# Altium PCB PMI_Split.PcbDoc
Units mm, origin at the board's own origin, x right, y up, seen from the top; angles counter-clockwise.
Board outline 65 x 25 mm, 2 copper layers (Top Layer, Bottom Layer); 12 components, 12 nets, 34 pads, 1 vias.
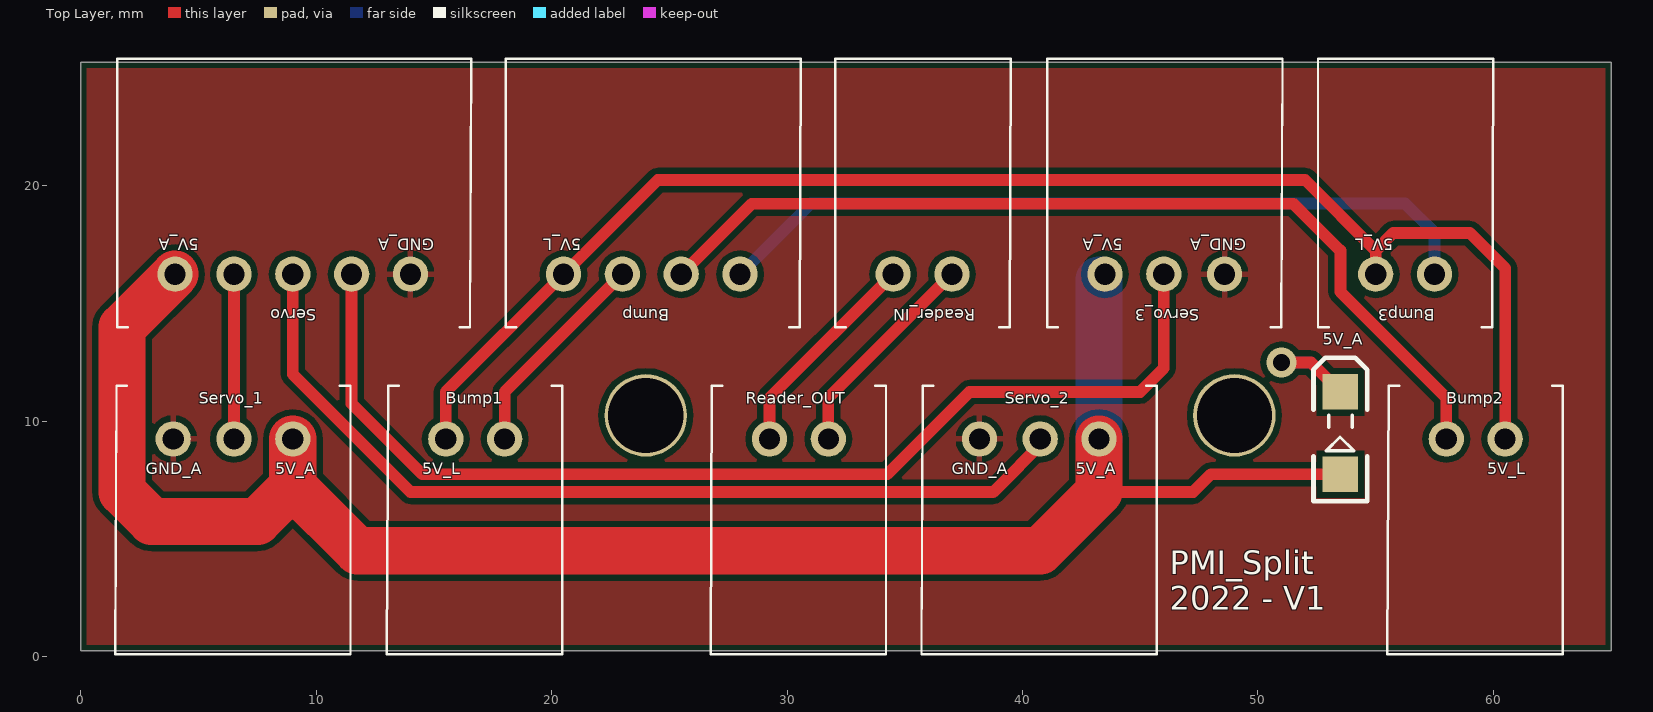
[diagram p0: Top Layer view]
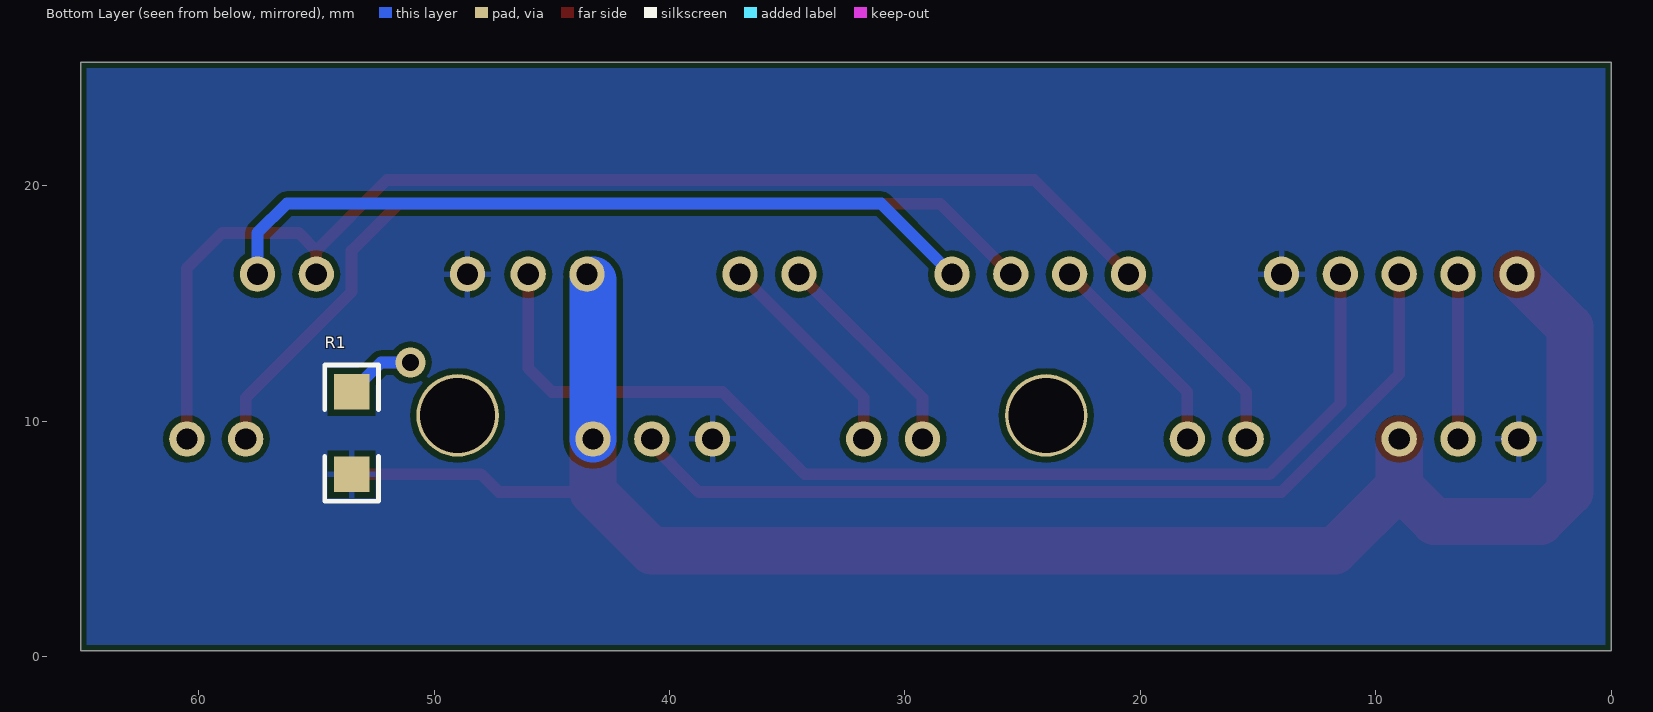
[diagram p1: Bottom Layer view, seen from below]
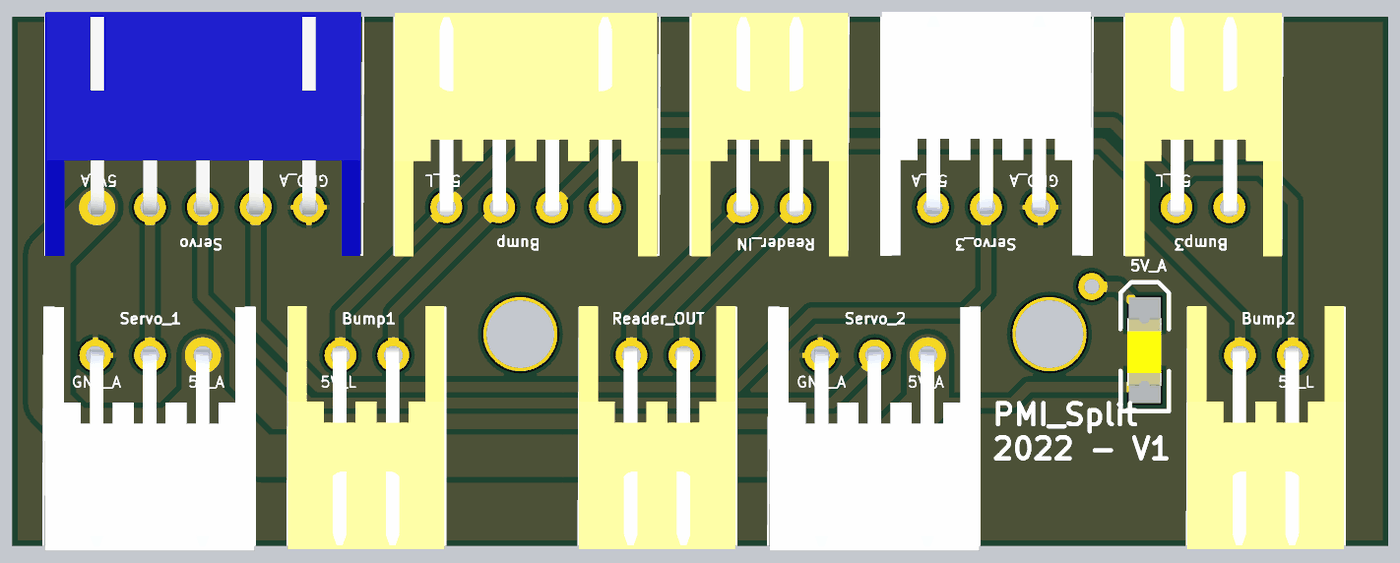
[diagram p2: 3D render of the assembled board from above, using the file's embedded part models]

## Layer stack, top to bottom
Top Solder: solder mask 0.0102, Solder Resist, Dk 3.5
Top Layer: signal copper 0.0356
Dielectric 1: dielectric 0.32, FR-4, Dk 4.8
Bottom Layer: signal copper 0.0356
Bottom Solder: solder mask 0.0102, Solder Resist, Dk 3.5

## Board outline
0,0.25 0,25.25 65,25.25 65,0.25

## Design rules (kind name [scope] priority, off if disabled: settings)
Clearance [All] p1: gap=0.254
HoleSize [All] p1: absolutevalues=TRUE maxlimit=10 minlimit=0.025 maxpercent=80.000 minpercent=20.000
PolygonConnect [All] p1: connectstyle=Relief reliefconductorwidth=0.254 reliefentries=4 polygonreliefangle="90 Angle" airgapwidth=0.254
RoutingVias [All] p1: holewidth=0.711 width=1.27 viastyle="Through Hole" minholewidth=0.711 minwidth=1.27 maxholewidth=0.711 maxwidth=1.27
SilkToSilkClearance [All] p1: silktosilkclearance=0
SilkToSolderMaskClearance [IsPad] p1: minsilkscreentomaskgap=0.01 clearancetoexposedcopper=TRUE
SolderMaskExpansion [All] p1: expansion=0.102
Width [All] p1: maxlimit=3 minlimit=0.254 preferedwidth=0.5
27 further rules are at their usual default settings.

## Components (designator, comment, footprint, x,y, rotation, side; value= is the part's Value field where it differs from the comment)
5V_A "5V_L" KP-3216SEC 53.5,9.5 r90 top (schematic designator LED1)
Bump "Header 4H" S4B-XH-A 20.5,16.25 r0 top
Bump1 "S2B-XH-A" S2B-XH-A 18,9.25 r180 top
Bump2 "S2B-XH-A" S2B-XH-A 60.5,9.25 r180 top
Bump3 "S2B-XH-A" S2B-XH-A 55,16.25 r0 top
R1 "Res2" "Resistor 1206" 53.5,9.5 r90 bottom
Reader_IN "S2B-XH-A" S2B-XH-A 34.5,16.25 r0 top
Reader_OUT "S2B-XH-A" S2B-XH-A 31.75,9.25 r180 top
Servo "Header 5H" S5B-XH-A 4,16.25 r0 top
Servo_1 "Header 3H" S3B-XH-A 9,9.25 r180 top
Servo_2 "Header 3H" S3B-XH-A 43.25,9.25 r180 top
Servo_3 "Header 3H" S3B-XH-A 43.5,16.25 r0 top

## Footprints (in the part's own frame and the unit in brackets; to place one, negate y for a bottom-side part, rotate by r counter-clockwise, add the part's x,y. Pads: shape width x height; smd on the part's side, far side on the other; paste and mask are expansions set on the pad)
KP-3216SEC [mm]
  rect 1.5x1.5 smd: 1(-1.75,0) 2(1.75,0)
  silkscreen extent -2.89,-1.14 3.2,1.14, body extent -1.7,-0.79 1.5,0.81, height 1.1
"Resistor 1206" [mm]
  rect 1.5x1.5 smd: 1(-1.75,0) 2(1.75,0)
  silkscreen extent -2.89,-1.14 2.89,1.14, body extent -1.98,-0.95 1.98,0.93, height 0.55
S2B-XH-A [mm]
  round 1.5 hole 0.9: 1(0,0) 2(2.5,0)
  silkscreen extent -2.45,-2.26 5,9.14, body extent -2.41,-2.32 4.99,9.18, height 6.15
S3B-XH-A [mm]
  round 1.5 hole 0.9: 1(0,0) 2(2.5,0) 3(5.08,0)
  silkscreen extent -2.45,-2.26 7.54,9.14, body extent -2.44,-2.27 7.46,9.23, height 6.15
S4B-XH-A [mm]
  round 1.5 hole 0.9: 1(0,0) 2(2.5,0) 3(5,0) 4(7.5,0)
  silkscreen extent -2.45,-2.26 10.08,9.14, body extent -2.44,-2.32 9.96,9.18, height 6.15
S5B-XH-A [mm]
  round 1.5 hole 0.9: 1(0,0) 2(2.5,0) 3(5,0) 4(7.5,0) 5(10,0)
  silkscreen extent -2.45,-2.26 12.58,9.14, body extent -2.45,-2.3 12.45,9.2, height 6.15

## Part data
5V_A: library part LED2, "Typical RED, GREEN, YELLOW, AMBER GaAs LED"
Bump: "Header, 4-Pin, Right Angle"
Bump1 Bump2 Bump3 Reader_IN Reader_OUT: library part "Header 2H", "Header, 2-Pin, Right Angle"
R1: "Resistor"
Servo: "Header, 5-Pin, Right Angle"
Servo_1 Servo_2 Servo_3: "Header, 3-Pin, Right Angle"

## Free pads (board coordinates)
  round 3.5 hole 3.2: 2(24,10.25) 2(49,10.25)

## Via types
v1: diameter 1.27, hole 0.711, Top Layer to Bottom Layer, 1 vias

## Nets (pads, with @x,y where several pads share a name; then routed paths per layer and width w, separated by ;. In a path a pad name is that pad's centre, name@x,y a point inside that pad or via, vN(x,y) a via of type N, cw(c..) or ccw(c..) an arc to the next point about the centre after c; other vN are vias at no path point)
5V_A: 5V_A.1 Servo.1 Servo_1.1 Servo_2.1 Servo_3.1 | length 76.9
  Top Layer w0.5: 43.25,7 47.25,7 48,7.75 5V_A.1
  Top Layer w2: Servo.1 1.75,14 1.75,7 3,5.75 7.5,5.75 9,7.25 ; Servo_1.1 9,7.25 ; Servo_2.1 43.25,7 40.75,4.5 11.75,4.5 9,7.25
  Bottom Layer w0.5: Servo_3.1@43.25,16 Servo_3.1
  Bottom Layer w2: Servo_2.1 Servo_3.1@43.25,16
5V_L: Bump1.2 Bump2.1 Bump3.1 Bump.1 | length 61.2
  Top Layer w0.5: Bump1.2 15.5,11.25 Bump.1 24.5,20.25 52,20.25 55,17.25 ; Bump3.1 55,17.25 ; Bump2.1 60.5,16.5 59,18 55.75,18 55,17.25
BUMP_1: Bump1.1 Bump.2 | length 9.1
  Top Layer w0.5: Bump1.1 18,11.25 Bump.2
BUMP_2: Bump2.2 Bump.3 | length 39.9
  Top Layer w0.5: Bump.3 28.496,19.246 51.504,19.246 53.5,17.25 53.5,15.5 58,11 Bump2.2
BUMP_3: Bump3.2 Bump.4 | length 33
  Bottom Layer w0.5: Bump.4 31,19.25 56.25,19.25 57.5,18 Bump3.2
GND_A: R1.1 Servo.5 Servo_1.3 Servo_2.3 Servo_3.3
NetLED1_2: 5V_A.2 R1.2 | length 6
  Top Layer w0.5: v1(51,12.5) 52.25,12.5 5V_A.2
  Bottom Layer w0.5: v1(51,12.5) 52.25,12.5 R1.2
READER_1: Reader_IN.1 Reader_OUT.2 | length 9.3
  Top Layer w0.5: Reader_OUT.2@29.5,9.25 29.25,9.5 29.25,11 Reader_IN.1
READER_2: Reader_IN.2 Reader_OUT.1 | length 9.3
  Top Layer w0.5: Reader_OUT.1@32,9.25 31.75,9.5 31.75,11 Reader_IN.2
SERVO_1: Servo.2 Servo_1.2 | length 7
  Top Layer w0.5: Servo_1.2 Servo.2
SERVO_2: Servo.3 Servo_2.2 | length 39.3
  Top Layer w0.5: Servo.3 9,12 14.004,6.996 38.746,6.996 Servo_2.2@41,9.25
SERVO_3: Servo.4 Servo_3.2 | length 47.1
  Top Layer w0.5: Servo.4 11.5,10.75 14.5,7.75 34.25,7.75 37.75,11.25 45,11.25 46,12.25 Servo_3.2

## Polygon pours and split planes (outlines as drawn)
GND_A on Top Layer "Bottom Layer-GND" (solid, remove dead copper, pour order 2): 0.25,0.5 0.25,25 64.75,25 64.75,0.5
GND_A on Bottom Layer "Bottom Layer-GND" (solid, remove dead copper, pour order 4): 0.25,25 64.75,25 64.75,0.5 0.25,0.5

## Silkscreen, mask and mechanical layers (free items; w line width, h text height)
Top Overlay:
  text "5V_A" at 5,17.75 h0.5 r180
  text "GND_A" at 15,17.75 h0.5 r180
  text "5V_L" at 21.25,17.75 h0.5 r180
  text "5V_A" at 44.25,17.75 h0.5 r180
  text "GND_A" at 49.5,17.75 h0.5 r180
  text "5V_L" at 55.75,17.75 h0.5 r180
  text "GND_A" at 2.75,7.75 h0.5
  text "5V_A" at 8.25,7.75 h0.5
  text "5V_L" at 14.5,7.75 h0.5
  text "GND_A" at 37,7.75 h0.5
  text "5V_A" at 42.25,7.75 h0.5
  text "5V_L" at 59.75,7.75 h0.5
  text "PMI_Split / 2022 - V1" at 46.25,2 h1